# EAGLE board pressure_mat_try2 (EAGLE 9.3.1)

Size 290 x 290 mm. Coordinates in mm from the lower left corner, seen from the top.
Outline: 0,0 289,0 290,290 1,290 0,0
Copper layers (1*16): Top 0.035mm / dielectric 1.5mm / Bottom 0.035mm
Design rules "default": minimum track width 6mil, minimum drill 0.35mm, track to track 6mil, track to pad 6mil, pad to pad 6mil, via to via 6mil, smd to smd 6mil, copper to edge 40mil, drill to drill 6mil, minimum pad ring 10mil, minimum via ring 8mil, stop-mask expansion 4mil, vias tented up to drill 0mil, thermal gap 10mil

## Footprints (pad centres in the part's own frame; a part is rotated, then mirrored left to right if it is on the bottom)
SOIC127P600X175-16N = smd 1.981 x 0.559: 1 -2.362,4.445; 2 -2.362,3.175; 3 -2.362,1.905; 4 -2.362,0.635; 5 -2.362,-0.635; 6 -2.362,-1.905; 7 -2.362,-3.175; 8 -2.362,-4.445; 9 2.362,-4.445; 10 2.362,-3.175; 11 2.362,-1.905; 12 2.362,-0.635; 13 2.362,0.635; 14 2.362,1.905; 15 2.362,3.175; 16 2.362,4.445
SSOP24 = smd 0.348 x 1.397: 1 -3.575,-3.656; 2 -2.925,-3.656; 3 -2.275,-3.656; 4 -1.625,-3.656; 5 -0.975,-3.656; 6 -0.325,-3.656; 7 0.325,-3.656; 8 0.975,-3.656; 9 1.625,-3.656; 10 2.275,-3.656; 11 2.925,-3.656; 12 3.575,-3.656; 13 3.575,3.656; 14 2.925,3.656; 15 2.275,3.656; 16 1.625,3.656; 17 0.975,3.656; 18 0.325,3.656; 19 -0.325,3.656; 20 -0.975,3.656; 21 -1.625,3.656; 22 -2.275,3.656; 23 -2.925,3.656; 24 -3.575,3.656
0402 = smd 0.85 x 0.9: 1 -0.58,0; 2 0.58,0
0603 = smd 1.1 x 1: 1 -0.85,0; 2 0.85,0
QFN65P600X600X100-29N = smd 1.05 x 0.35: 1 -2.85,1.95; 2 -2.85,1.3; 3 -2.85,0.65; 4 -2.85,0; 5 -2.85,-0.65; 6 -2.85,-1.3; 7 -2.85,-1.95; 15 2.85,-1.95; 16 2.85,-1.3; 17 2.85,-0.65; 18 2.85,0; 19 2.85,0.65; 20 2.85,1.3; 21 2.85,1.95 | smd 0.35 x 1.05: 8 -1.95,-2.85; 9 -1.3,-2.85; 10 -0.65,-2.85; 11 0,-2.85; 12 0.65,-2.85; 13 1.3,-2.85; 14 1.95,-2.85; 22 1.95,2.85; 23 1.3,2.85; 24 0.65,2.85; 25 0,2.85; 26 -0.65,2.85; 27 -1.3,2.85; 28 -1.95,2.85 | smd 4.2 x 4.2: 29 0,0
PCB_CONNECTOR_10_PIN = smd 2 x 2: P$1 0,0; P$2 2,2; P$3 4,4; P$4 6,6; P$5 8,8; P$6 10,10; P$7 12,12; P$8 14,14; P$9 16,16; P$10 18,18
2X20 = drill 1.016 pad 1.88: 1 0,0; 2 0,2.54; 3 2.54,0; 4 2.54,2.54; 5 5.08,0; 6 5.08,2.54; 7 7.62,0; 8 7.62,2.54; 9 10.16,0; 10 10.16,2.54; 11 12.7,0; 12 12.7,2.54; 13 15.24,0; 14 15.24,2.54; 15 17.78,0; 16 17.78,2.54; 17 20.32,0; 18 20.32,2.54; 19 22.86,0; 20 22.86,2.54; 21 25.4,0; 22 25.4,2.54; 23 27.94,0; 24 27.94,2.54; 25 30.48,0; 26 30.48,2.54; 27 33.02,0; 28 33.02,2.54; 29 35.56,0; 30 35.56,2.54; 31 38.1,0; 32 38.1,2.54; 33 40.64,0; 34 40.64,2.54; 35 43.18,0; 36 43.18,2.54; 37 45.72,0; 38 45.72,2.54; 39 48.26,0; 40 48.26,2.54
64GRID = smd 5.08 x 2.54: P$1 258,0; P$2 258,4; P$3 258,8; P$4 258,12; P$5 258,16; P$6 258,20; P$7 258,24; P$8 258,28; P$9 258,32; P$10 258,36; P$11 258,40; P$12 258,44; P$13 258,48; P$14 258,52; P$15 258,56; P$16 258,60; P$17 258,64; P$18 258,68; P$19 258,72; P$20 258,76; P$21 258,80; P$22 258,84; P$23 258,88; P$24 258,92; P$25 258,96; P$26 258,100; P$27 258,104; P$28 258,108; P$29 258,112; P$30 258,116; P$31 258,120; P$32 258,124; P$33 258,128; P$34 258,132; P$35 258,136; P$36 258,140; P$37 258,144; P$38 258,148; P$39 258,152; P$40 258,156; P$41 258,160; P$42 258,164; P$43 258,168; P$44 258,172; P$45 258,176; P$46 258,180; P$47 258,184; P$48 258,188; P$49 258,192; P$50 258,196; P$51 258,200; P$52 258,204; P$53 258,208; P$54 258,212; P$55 258,216; P$56 258,220; P$57 258,224; P$58 258,228; P$59 258,232; P$60 258,236; P$61 258,240; P$62 258,244; P$63 258,248; P$64 258,252

## Placement (x,y rotation side)
ADC  MCP3008T-I/SL  [SOIC127P600X175-16N]  282.94,245.29 0 top
ANALOG_MUX0  MUX-74HC4067  [SSOP24]  282.94,25.38 180 top
ANALOG_MUX1  MUX-74HC4067  [SSOP24]  282.94,82.88 180 top
ANALOG_MUX2  MUX-74HC4067  [SSOP24]  282.94,184.38 180 top
ANALOG_MUX3  MUX-74HC4067  [SSOP24]  282.94,229.88 180 top
C1  0.1uF  [0402]  -4,-2 0 top  (outside the outline)
C2  0.1uF  [0603]  120.58,281.45 90 top
C3  0.1uF  [0402]  -4,-5.5 0 top  (outside the outline)
C4  0.1uF  [0402]  -4,-9 0 top  (outside the outline)
C5  0.1uF  [0402]  -4,-12.5 0 top  (outside the outline)
C6  0.1uF  [0402]  -4,-16 0 top  (outside the outline)
C7  0.1uF  [0402]  -4,-19.5 0 top  (outside the outline)
C8  0.1uF  [0402]  -4,-23 0 top  (outside the outline)
C9  0.1uF  [0402]  -4,-26.5 0 top  (outside the outline)
C10  0.1uF  [0402]  -4,-30 0 top  (outside the outline)
DIGITAL_MUX1  MCP23017T-E_ML  [QFN65P600X600X100-29N]  283.46,54.69 0 top
DIGITAL_MUX2  MCP23017T-E_ML  [QFN65P600X600X100-29N]  283.46,109.07 0 top
DIGITAL_MUX3  MCP23017T-E_ML  [QFN65P600X600X100-29N]  283.46,210.45 0 top
DIGITAL_MUX4  MCP23017T-E_ML  [QFN65P600X600X100-29N]  282.96,260.33 0 top
PAD_BUS  PCB_CONNECTOR_10_PIN  [PCB_CONNECTOR_10_PIN]  267,267 0 top
R1  2.2K  [0402]  264.5,2 0 top
R2  2.2K  [0402]  264.5,6 0 top
R3  2.2K  [0402]  264.5,10 0 top
R4  2.2K  [0402]  264.5,14 0 top
R5  10K  [0603]  276.81,229.73 270 top
R6  2.2K  [0402]  264.5,18 0 top
R7  2.2K  [0402]  264.5,22 0 top
R8  2.2K  [0402]  264.5,26 0 top
R9  2.2K  [0402]  264.5,30 0 top
R10  4.7k  [0603]  125.21,280.1 0 top
R11  4.7k  [0603]  125.02,282.1 0 top
R12  2.2K  [0402]  264.5,34 0 top
R13  2.2K  [0402]  264.5,38 0 top
R14  2.2K  [0402]  264.5,42 0 top
R15  2.2K  [0402]  264.5,46 0 top
R16  2.2K  [0402]  264.5,50 0 top
R17  2.2K  [0402]  264.5,54 0 top
R18  2.2K  [0402]  264.5,58 0 top
R19  2.2K  [0402]  264.5,62 0 top
R20  2.2K  [0402]  264.5,66 0 top
R21  2.2K  [0402]  264.5,70 0 top
R22  2.2K  [0402]  264.5,74 0 top
R23  2.2K  [0402]  264.5,78 0 top
R24  2.2K  [0402]  264.5,82 0 top
R25  2.2K  [0402]  264.5,86 0 top
R26  2.2K  [0402]  264.5,90 0 top
R27  2.2K  [0402]  264.5,94 0 top
R28  2.2K  [0402]  264.5,98 0 top
R29  2.2K  [0402]  264.5,102 0 top
R30  2.2K  [0402]  264.5,106 0 top
R31  2.2K  [0402]  264.5,110 0 top
R32  2.2K  [0402]  264.5,114 0 top
R33  2.2K  [0402]  264.5,118 0 top
R34  2.2K  [0402]  264.5,122 0 top
R35  2.2K  [0402]  264.5,126 0 top
R36  2.2K  [0402]  264.5,130 0 top
R37  2.2K  [0402]  264.5,134 0 top
R38  2.2K  [0402]  264.5,138 0 top
R39  2.2K  [0402]  264.5,142 0 top
R40  2.2K  [0402]  264.5,146 0 top
R41  2.2K  [0402]  264.5,150 0 top
R42  2.2K  [0402]  264.5,154 0 top
R43  2.2K  [0402]  264.5,158 0 top
R44  2.2K  [0402]  264.5,162 0 top
R45  2.2K  [0402]  264.5,166 0 top
R46  2.2K  [0402]  264.5,170 0 top
R47  2.2K  [0402]  264.5,174 0 top
R48  2.2K  [0402]  264.5,178 0 top
R49  2.2K  [0402]  264.5,182 0 top
R50  2.2K  [0402]  264.5,186 0 top
R51  2.2K  [0402]  264.5,190 0 top
R52  2.2K  [0402]  264.5,194 0 top
R53  2.2K  [0402]  264.5,198 0 top
R54  2.2K  [0402]  264.5,202 0 top
R55  2.2K  [0402]  264.5,206 0 top
R56  2.2K  [0402]  264.5,210 0 top
R57  2.2K  [0402]  264.5,214 0 top
R58  2.2K  [0402]  264.5,218 0 top
R59  2.2K  [0402]  264.5,222 0 top
R60  2.2K  [0402]  264.5,226 0 top
R61  2.2K  [0402]  264.5,230 0 top
R62  2.2K  [0402]  264.5,234 0 top
R63  2.2K  [0402]  264.5,238 0 top
R64  2.2K  [0402]  264.5,242 0 top
R65  2.2K  [0402]  264.5,246 0 top
R66  2.2K  [0402]  264.5,250 0 top
R67  2.2K  [0402]  264.5,254 0 top
R68  100k  [0603]  -4.5,-33 0 top  (outside the outline)
RPI_BUS  RASPBERRYPI-40-PIN-GPIO_PTH_NO_SHROUD  [2X20]  121.23,285.24 0 top
U$1  64GRID  [64GRID]  1.18,2.54 0 top

## Library data of the parts
ADC = MCP3008 not a duplicate; DESCRIPTION: Eight Channel SPI Serial Interface 2.7 V 10-Bit A/D Converter SMT - SOIC-16; DIGI-KEY_PART_NUMBER: MCP3008T-I/SLCT-ND; DIGI-KEY_PURCHASE_URL: https://www.digikey.com/product-detail/en/microchip-technology/MCP3008T-I-SL/MCP3008T-I-SLCT-ND/5148847?utm_source=snapeda&utm_medium=aggregator&utm_campaign=symbol; MF: Microchip; MP: MCP3008T-I/SL; PACKAGE: SOIC-16 Microchip
ANALOG_MUX0 ANALOG_MUX1-ANALOG_MUX3 C2 R5 R68 = SparkFun
C1 C3-C10 = SparkFun-Capacitors; PROD_ID: CAP-12416
DIGITAL_MUX1-DIGITAL_MUX4 = SamacSys_Parts; DESCRIPTION: Interface - I/O Expanders 16bit Input/Output Exp I2C interface; HEIGHT: 1mm; MANUFACTURER_NAME: Microchip; MANUFACTURER_PART_NUMBER: MCP23017T-E/ML; MOUSER_PART_NUMBER: 579-MCP23017T-E/ML
PAD_BUS U$1 = Pressure_Pad
R1-R4 R6-R9 R12-R67 = SparkFun-Resistors; PROD_ID: RES-13495
R10 R11 = SparkFun-Resistors; PROD_ID: RES-07857
RPI_BUS = SparkFun-Connectors

## Nets
3.3V0: ANALOG_MUX0.24 ANALOG_MUX1.24 ANALOG_MUX2.24 ANALOG_MUX3.24 C1.1 C2.1 C3.1 C4.1 C5.1 C6.1 C7.1 C8.1 C9.1 DIGITAL_MUX1.5 DIGITAL_MUX1.14 DIGITAL_MUX2.5 DIGITAL_MUX2.14 DIGITAL_MUX3.5 DIGITAL_MUX3.14 DIGITAL_MUX4.5 DIGITAL_MUX4.14 PAD_BUS.P$2 R10.1 R11.1 RPI_BUS.1 RPI_BUS.17
5V: RPI_BUS.2 RPI_BUS.4
A_MUX0_IN: ADC.4
A_MUX0_OUT: ANALOG_MUX0.1 PAD_BUS.P$6
A_MUX1_IN: ADC.3
A_MUX1_OUT: ANALOG_MUX1.1
A_MUX2_IN: ADC.2
A_MUX2_OUT: ANALOG_MUX2.1 PAD_BUS.P$4
A_MUX3_IN: ADC.1
A_MUX3_OUT: ANALOG_MUX3.1
A_MUX_IN1: PAD_BUS.P$5
A_MUX_OUT3: PAD_BUS.P$3
CLK: ADC.13 PAD_BUS.P$9 RPI_BUS.23
CS: ADC.10 PAD_BUS.P$10 RPI_BUS.24
D0: ANALOG_MUX0.10 ANALOG_MUX1.10 ANALOG_MUX2.10 ANALOG_MUX3.10 RPI_BUS.29
D1: ANALOG_MUX0.11 ANALOG_MUX1.11 ANALOG_MUX2.11 ANALOG_MUX3.11 RPI_BUS.31
D2: ANALOG_MUX0.14 ANALOG_MUX1.14 ANALOG_MUX2.14 ANALOG_MUX3.14 RPI_BUS.32
D3: ANALOG_MUX0.13 ANALOG_MUX1.13 ANALOG_MUX2.13 ANALOG_MUX3.13 RPI_BUS.33
EN0: ANALOG_MUX0.15 ANALOG_MUX1.15 ANALOG_MUX2.15 ANALOG_MUX3.15 R5.2
GND: ADC.9 ADC.14 ANALOG_MUX0.12 ANALOG_MUX1.12 ANALOG_MUX2.12 ANALOG_MUX3.12 C1.2 C2.2 C3.2 C4.2 C5.2 C6.2 C7.2 C8.2 C9.2 C10.1 DIGITAL_MUX1.6 DIGITAL_MUX1.11 DIGITAL_MUX1.12 DIGITAL_MUX1.13 DIGITAL_MUX2.6 DIGITAL_MUX2.12 DIGITAL_MUX2.13 DIGITAL_MUX3.6 DIGITAL_MUX3.11 DIGITAL_MUX3.13 DIGITAL_MUX4.6 DIGITAL_MUX4.13 PAD_BUS.P$1 R1.2 R2.2 R3.2 R4.2 R5.1 R6.2 R7.2 R8.2 R9.2 R12.2 R13.2 R14.2 R15.2 R16.2 R17.2 R18.2 R19.2 R20.2 R21.2 R22.2 R23.2 R24.2 R25.2 R26.2 R27.2 R28.2 R29.2 R30.2 R31.2 R32.2 R33.2 R34.2 R35.2 R36.2 R37.2 R38.2 R39.2 R40.2 R41.2 R42.2 R43.2 R44.2 R45.2 R46.2 R47.2 R48.2 R49.2 R50.2 R51.2 R52.2 R53.2 R54.2 R55.2 R56.2 R57.2 R58.2 R59.2 R60.2 R61.2 R62.2 R63.2 R64.2 R65.2 R66.2 R67.2 RPI_BUS.6 RPI_BUS.9 RPI_BUS.14 RPI_BUS.20 RPI_BUS.25 RPI_BUS.30 RPI_BUS.34 RPI_BUS.39
I2C$SCL: DIGITAL_MUX1.8 DIGITAL_MUX2.8 DIGITAL_MUX3.8 DIGITAL_MUX4.8 R11.2 RPI_BUS.5
I2C$SDA: DIGITAL_MUX1.9 DIGITAL_MUX2.9 DIGITAL_MUX3.9 DIGITAL_MUX4.9 R10.2 RPI_BUS.3
MISO: ADC.12 PAD_BUS.P$7 RPI_BUS.21
MOSI: ADC.11 PAD_BUS.P$8 RPI_BUS.19
N$1: ADC.15 C10.2 R68.1
P$1: ANALOG_MUX0.16 DIGITAL_MUX1.17 R1.1 U$1.P$1
P$2: ANALOG_MUX0.17 DIGITAL_MUX1.18 R2.1 U$1.P$2
P$3: ANALOG_MUX0.18 DIGITAL_MUX1.19 R3.1 U$1.P$3
P$4: ANALOG_MUX0.19 DIGITAL_MUX1.20 R4.1 U$1.P$4
P$5: ANALOG_MUX0.20 DIGITAL_MUX1.21 R6.1 U$1.P$5
P$6: ANALOG_MUX0.21 DIGITAL_MUX1.22 R7.1 U$1.P$6
P$7: ANALOG_MUX0.22 DIGITAL_MUX1.23 R8.1 U$1.P$7
P$8: ANALOG_MUX0.23 DIGITAL_MUX1.24 R9.1 U$1.P$8
P$9: ANALOG_MUX0.2 DIGITAL_MUX1.25 R12.1 U$1.P$9
P$10: ANALOG_MUX0.3 DIGITAL_MUX1.26 R13.1 U$1.P$10
P$11: ANALOG_MUX0.4 DIGITAL_MUX1.27 R14.1 U$1.P$11
P$12: ANALOG_MUX0.5 DIGITAL_MUX1.28 R15.1 U$1.P$12
P$13: ANALOG_MUX0.6 DIGITAL_MUX1.1 R16.1 U$1.P$13
P$14: ANALOG_MUX0.7 DIGITAL_MUX1.2 R17.1 U$1.P$14
P$15: ANALOG_MUX0.8 DIGITAL_MUX1.3 R18.1 U$1.P$15
P$16: ANALOG_MUX0.9 DIGITAL_MUX1.4 R19.1 U$1.P$16
P$17: ANALOG_MUX1.16 DIGITAL_MUX2.17 R20.1 U$1.P$17
P$18: ANALOG_MUX1.17 DIGITAL_MUX2.18 R21.1 U$1.P$18
P$19: ANALOG_MUX1.18 DIGITAL_MUX2.19 R22.1 U$1.P$19
P$20: ANALOG_MUX1.19 DIGITAL_MUX2.20 R23.1 U$1.P$20
P$21: ANALOG_MUX1.20 DIGITAL_MUX2.21 R24.1 U$1.P$21
P$22: ANALOG_MUX1.21 DIGITAL_MUX2.22 R25.1 U$1.P$22
P$23: ANALOG_MUX1.22 DIGITAL_MUX2.23 R26.1 U$1.P$23
P$24: ANALOG_MUX1.23 DIGITAL_MUX2.24 R27.1 U$1.P$24
P$25: ANALOG_MUX1.2 DIGITAL_MUX2.25 R28.1 U$1.P$25
P$26: ANALOG_MUX1.3 DIGITAL_MUX2.26 R29.1 U$1.P$26
P$27: ANALOG_MUX1.4 DIGITAL_MUX2.27 R30.1 U$1.P$27
P$28: ANALOG_MUX1.5 DIGITAL_MUX2.28 R31.1 U$1.P$28
P$29: ANALOG_MUX1.6 DIGITAL_MUX2.1 R32.1 U$1.P$29
P$30: ANALOG_MUX1.7 DIGITAL_MUX2.2 R33.1 U$1.P$30
P$31: ANALOG_MUX1.8 DIGITAL_MUX2.3 R34.1 U$1.P$31
P$32: ANALOG_MUX1.9 DIGITAL_MUX2.4 R35.1 U$1.P$32
P$33: ANALOG_MUX2.16 DIGITAL_MUX3.17 R36.1 U$1.P$33
P$34: ANALOG_MUX2.17 DIGITAL_MUX3.18 R37.1 U$1.P$34
P$35: ANALOG_MUX2.18 DIGITAL_MUX3.19 R38.1 U$1.P$35
P$36: ANALOG_MUX2.19 DIGITAL_MUX3.20 R39.1 U$1.P$36
P$37: ANALOG_MUX2.20 DIGITAL_MUX3.21 R40.1 U$1.P$37
P$38: ANALOG_MUX2.21 DIGITAL_MUX3.22 R41.1 U$1.P$38
P$39: ANALOG_MUX2.22 DIGITAL_MUX3.23 R42.1 U$1.P$39
P$40: ANALOG_MUX2.23 DIGITAL_MUX3.24 R43.1 U$1.P$40
P$41: ANALOG_MUX2.2 DIGITAL_MUX3.25 R44.1 U$1.P$41
P$42: ANALOG_MUX2.3 DIGITAL_MUX3.26 R45.1 U$1.P$42
P$43: ANALOG_MUX2.4 DIGITAL_MUX3.27 R46.1 U$1.P$43
P$44: ANALOG_MUX2.5 DIGITAL_MUX3.28 R47.1 U$1.P$44
P$45: ANALOG_MUX2.6 DIGITAL_MUX3.1 R48.1 U$1.P$45
P$46: ANALOG_MUX2.7 DIGITAL_MUX3.2 R49.1 U$1.P$46
P$47: ANALOG_MUX2.8 DIGITAL_MUX3.3 R50.1 U$1.P$47
P$48: ANALOG_MUX2.9 DIGITAL_MUX3.4 R51.1 U$1.P$48
P$49: ANALOG_MUX3.16 DIGITAL_MUX4.17 R52.1 U$1.P$49
P$50: ANALOG_MUX3.17 DIGITAL_MUX4.18 R53.1 U$1.P$50
P$51: ANALOG_MUX3.18 DIGITAL_MUX4.19 R54.1 U$1.P$51
P$52: ANALOG_MUX3.19 DIGITAL_MUX4.20 R55.1 U$1.P$52
P$53: ANALOG_MUX3.20 DIGITAL_MUX4.21 R56.1 U$1.P$53
P$54: ANALOG_MUX3.21 DIGITAL_MUX4.22 R57.1 U$1.P$54
P$55: ANALOG_MUX3.22 DIGITAL_MUX4.23 R58.1 U$1.P$55
P$56: ANALOG_MUX3.23 DIGITAL_MUX4.24 R59.1 U$1.P$56
P$57: ANALOG_MUX3.2 DIGITAL_MUX4.25 R60.1 U$1.P$57
P$58: ANALOG_MUX3.3 DIGITAL_MUX4.26 R61.1 U$1.P$58
P$59: ANALOG_MUX3.4 DIGITAL_MUX4.27 R62.1 U$1.P$59
P$60: ANALOG_MUX3.5 DIGITAL_MUX4.28 R63.1 U$1.P$60
P$61: ANALOG_MUX3.6 DIGITAL_MUX4.1 R64.1 U$1.P$61
P$62: ANALOG_MUX3.7 DIGITAL_MUX4.2 R65.1 U$1.P$62
P$63: ANALOG_MUX3.8 DIGITAL_MUX4.3 R66.1 U$1.P$63
P$64: ANALOG_MUX3.9 DIGITAL_MUX4.4 R67.1 U$1.P$64
PIN_3: DIGITAL_MUX1.15 DIGITAL_MUX2.15 DIGITAL_MUX3.15 DIGITAL_MUX4.15
VCC: ADC.16 DIGITAL_MUX2.11 DIGITAL_MUX3.12 DIGITAL_MUX4.11 DIGITAL_MUX4.12 R68.2

## Tracks (layer width: path | path; a pad name or v marks a point on that pad's centre or on a via)
3.3V0  (25 unrouted)
5V  (1 unrouted)
A_MUX0_OUT  (1 unrouted)
A_MUX2_OUT  (1 unrouted)
CLK  (2 unrouted)
CS  (2 unrouted)
D0  (4 unrouted)
D1  (4 unrouted)
D2  (4 unrouted)
D3  (4 unrouted)
EN0  (4 unrouted)
GND  (101 unrouted)
I2C$SCL  (5 unrouted)
I2C$SDA  (5 unrouted)
MISO  (2 unrouted)
MOSI  (2 unrouted)
N$1  (2 unrouted)
P$1  (3 unrouted)
P$2  (3 unrouted)
P$3  (3 unrouted)
P$4  (3 unrouted)
P$5  (3 unrouted)
P$6  (3 unrouted)
P$7  (3 unrouted)
P$8  (3 unrouted)
P$9  (3 unrouted)
P$10  (3 unrouted)
P$11  (3 unrouted)
P$12  (3 unrouted)
P$13  (3 unrouted)
P$14  (3 unrouted)
P$15  (3 unrouted)
P$16  (3 unrouted)
P$17  (3 unrouted)
P$18  (3 unrouted)
P$19  (3 unrouted)
P$20  (3 unrouted)
P$21  (3 unrouted)
P$22  (3 unrouted)
P$23  (3 unrouted)
P$24  (3 unrouted)
P$25  (3 unrouted)
P$26  (3 unrouted)
P$27  (3 unrouted)
P$28  (3 unrouted)
P$29  (3 unrouted)
P$30  (3 unrouted)
P$31  (3 unrouted)
P$32  (3 unrouted)
P$33  (3 unrouted)
P$34  (3 unrouted)
P$35  (3 unrouted)
P$36  (3 unrouted)
P$37  (3 unrouted)
P$38  (3 unrouted)
P$39  (3 unrouted)
P$40  (3 unrouted)
P$41  (3 unrouted)
P$42  (3 unrouted)
P$43  (3 unrouted)
P$44  (3 unrouted)
P$45  (3 unrouted)
P$46  (3 unrouted)
P$47  (3 unrouted)
P$48  (3 unrouted)
P$49  (3 unrouted)
P$50  (3 unrouted)
P$51  (3 unrouted)
P$52  (3 unrouted)
P$53  (3 unrouted)
P$54  (3 unrouted)
P$55  (3 unrouted)
P$56  (3 unrouted)
P$57  (3 unrouted)
P$58  (3 unrouted)
P$59  (3 unrouted)
P$60  (3 unrouted)
P$61  (3 unrouted)
P$62  (3 unrouted)
P$63  (3 unrouted)
P$64  (3 unrouted)
PIN_3  (3 unrouted)
VCC  (5 unrouted)
(copper drawn outside any net)
  shapes: Top area x8